# Altium PCB SOIC8.PcbDoc
Units mil, origin at the board's own origin, x right, y up, seen from the top; angles counter-clockwise.
Board outline 487 x 499.22 mil, 2 copper layers (Top Layer, Bottom Layer); 9 components, 142 nets, 16 pads, 2 vias.
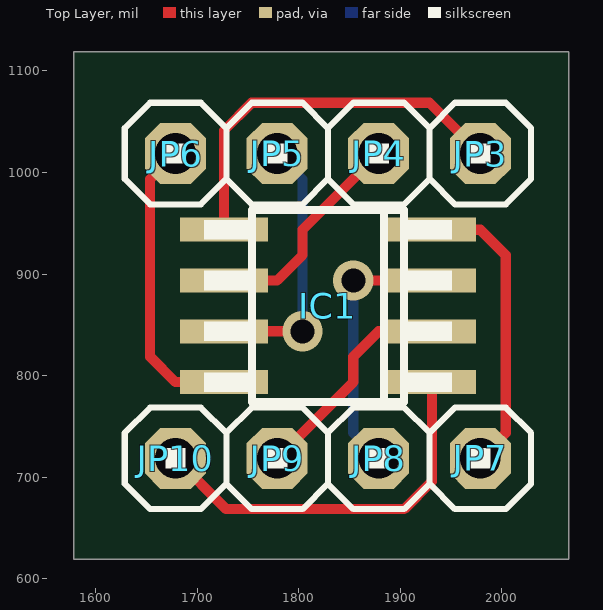
[diagram p0: Top Layer view]
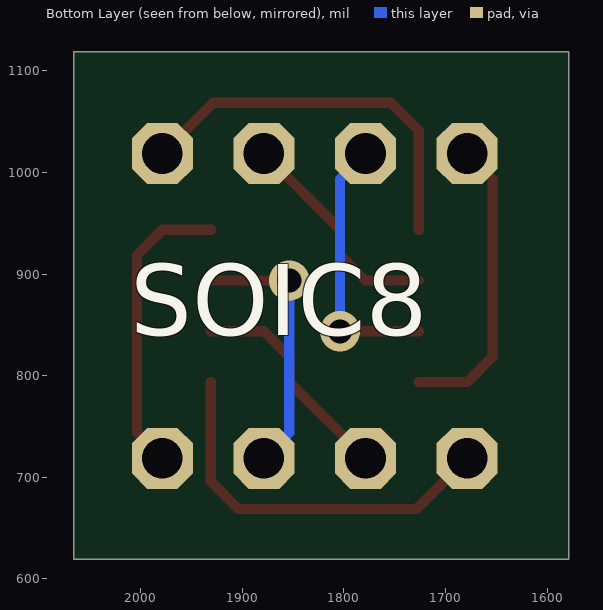
[diagram p1: Bottom Layer view, seen from below]

## Layer stack, top to bottom
Top Layer: signal copper 1.4
Dielectric: dielectric 12.6, FR-4, Dk 4.8
Bottom Layer: signal copper 1.4

## Board outline
1578.67,1118.67 2065.67,1118.67 2065.67,619.45 1578.67,619.45

## Design rules (kind name [scope] priority, off if disabled: settings)
Clearance [All] p1: gap=10
PolygonConnect [All] p1: connectstyle=Relief reliefconductorwidth=10 reliefentries=4 polygonreliefangle="90 Angle"
RoutingVias [All] p1: holewidth=28 width=50 viastyle="Through Hole" minholewidth=28 minwidth=50 maxholewidth=28 maxwidth=50
SilkscreenOverComponentPads [All] p1: minsilkscreentomaskgap=10
SolderMaskExpansion [All] p1: expansion=4
Width [All] p1: maxlimit=10 minlimit=10 preferedwidth=10
27 further rules are at their usual default settings.

## Components (designator, comment, footprint, x,y, rotation, side; value= is the part's Value field where it differs from the comment)
IC1 "UA741D" SO08 1828.67,868.67 r90 top
JP3 "Comment" 1X01 1978.67,1018.67 r270 top
JP4 "Comment" 1X01 1878.67,1018.67 r270 top
JP5 "Comment" 1X01 1778.67,1018.67 r270 top
JP6 "Comment" 1X01 1678.67,1018.67 r270 top
JP7 "Comment" 1X01 1978.67,718.67 r270 top
JP8 "Comment" 1X01 1878.67,718.67 r270 top
JP9 "Comment" 1X01 1778.67,718.67 r270 top
JP10 "Comment" 1X01 1678.67,718.67 r270 top

## Footprints (in the part's own frame and the unit in brackets; to place one, negate y for a bottom-side part, rotate by r counter-clockwise, add the part's x,y. Pads: shape width x height; smd on the part's side, far side on the other; paste and mask are expansions set on the pad)
1X01 [mil]
  oct 60x60 hole 40: 1(0,0)
  silkscreen extent -50,-50 50,50
SO08 [mm]
  rect 0.6x2.2 smd: 1(-1.905,-2.6) 2(-0.635,-2.6) 3(0.635,-2.6) 4(1.905,-2.6) 5(1.905,2.6) 6(0.635,2.6) 7(-0.635,2.6) 8(-1.905,2.6)
  silkscreen extent -2.4,-3.1 2.4,3.1

## Via types
v1: diameter 39.62, hole 23.62, Top Layer to Bottom Layer, 2 vias

## Nets (pads, with @x,y where several pads share a name; then routed paths per layer and width w, separated by ;. In a path a pad name is that pad's centre, name@x,y a point inside that pad or via, vN(x,y) a via of type N, cw(c..) or ccw(c..) an arc to the next point about the centre after c; other vN are vias at no path point)
N$1: 
N$2: 
N$3: 
N$4: 
N$5: 
N$6: 
N$7: 
N$8: 
N$9: 
N$10: 
N$11: 
N$12: 
N$13: 
N$14: 
N$15: 
N$16: 
N$17: 
N$18: 
N$19: 
N$20: 
N$21: 
N$22: 
N$23: 
N$24: 
N$25: 
N$26: 
N$27: 
N$28: 
N$29: 
N$30: 
N$31: 
N$32: 
N$33: 
N$34: 
N$35: 
N$36: 
N$37: IC1.1 JP10.1 | length 382
  Top Layer w10: JP10.1 1728.67,668.67 1903.67,668.67 1931.03,696.03 IC1.1
N$38: IC1.2 JP9.1 | length 218.8
  Top Layer w10: JP9.1 1853.67,793.67 1853.67,818.67 1878.67,843.67 IC1.2
N$39: IC1.3 JP8.1 | length 262.7
  Top Layer w10: v1(1853.67,893.67) IC1.3
  Bottom Layer w10: v1(1853.67,893.67) 1853.67,743.67 JP8.1
N$40: IC1.4 JP7.1 | length 293.4
  Top Layer w10: IC1.4 1978.67,943.67 2003.67,918.67 2003.67,743.67 JP7.1
N$41: IC1.5 JP3.1 | length 382
  Top Layer w10: IC1.5 1726.3,1041.3 1753.67,1068.67 1928.67,1068.67 JP3.1
N$42: IC1.6 JP4.1 | length 218.8
  Top Layer w10: IC1.6 1778.67,893.67 1803.67,918.67 1803.67,943.67 JP4.1
N$43: IC1.7 JP5.1 | length 262.7
  Top Layer w10: IC1.7 v1(1803.67,843.67)
  Bottom Layer w10: JP5.1 1803.67,993.67 v1(1803.67,843.67)
N$44: IC1.8 JP6.1 | length 293.3
  Top Layer w10: JP6.1 1653.67,993.67 1653.67,818.67 1678.67,793.67 IC1.8
S$1: 
S$2: 
S$3: 
S$4: 
S$5: 
S$6: 
S$7: 
S$8: 
S$9: 
S$10: 
S$11: 
S$12: 
S$13: 
S$14: 
S$15: 
S$16: 
S$17: 
S$18: 
S$19: 
S$20: 
S$21: 
S$22: 
S$23: 
S$24: 
S$25: 
S$26: 
S$27: 
S$28: 
S$29: 
S$30: 
S$31: 
S$32: 
S$33: 
S$34: 
S$35: 
S$36: 
S$37: 
S$38: 
S$39: 
S$40: 
S$41: 
S$42: 
S$43: 
S$44: 
S$45: 
S$46: 
S$47: 
S$48: 
S$49: 
S$50: 
S$51: 
S$52: 
S$53: 
S$54: 
S$55: 
S$56: 
S$57: 
S$58: 
S$59: 
S$60: 
S$61: 
S$62: 
S$63: 
S$64: 
S$65: 
S$66: 
S$67: 
S$68: 
S$69: 
S$70: 
S$71: 
S$72: 
S$73: 
S$74: 
S$75: 
S$76: 
S$77: 
S$78: 
S$79: 
S$80: 
S$81: 
S$82: 
S$83: 
S$84: 
S$85: 
S$86: 
S$87: 
S$88: 
S$89: 
S$90: 
S$91: 
S$92: 
S$93: 
S$94: 
S$95: 
S$96: 
S$97: 
S$98: 

## Silkscreen, mask and mechanical layers (free items; w line width, h text height)
Bottom Overlay:
  text "SOIC8" at 2010,840 h70